# Altium PCB HTY-21024A V01.PcbDoc
Units mm, origin at the board's own origin, x right, y up, seen from the top; angles counter-clockwise.
Board outline 61 x 86.5 mm, 2 copper layers (Top Layer, Bottom Layer); 45 components, 35 nets, 149 pads, 0 vias.
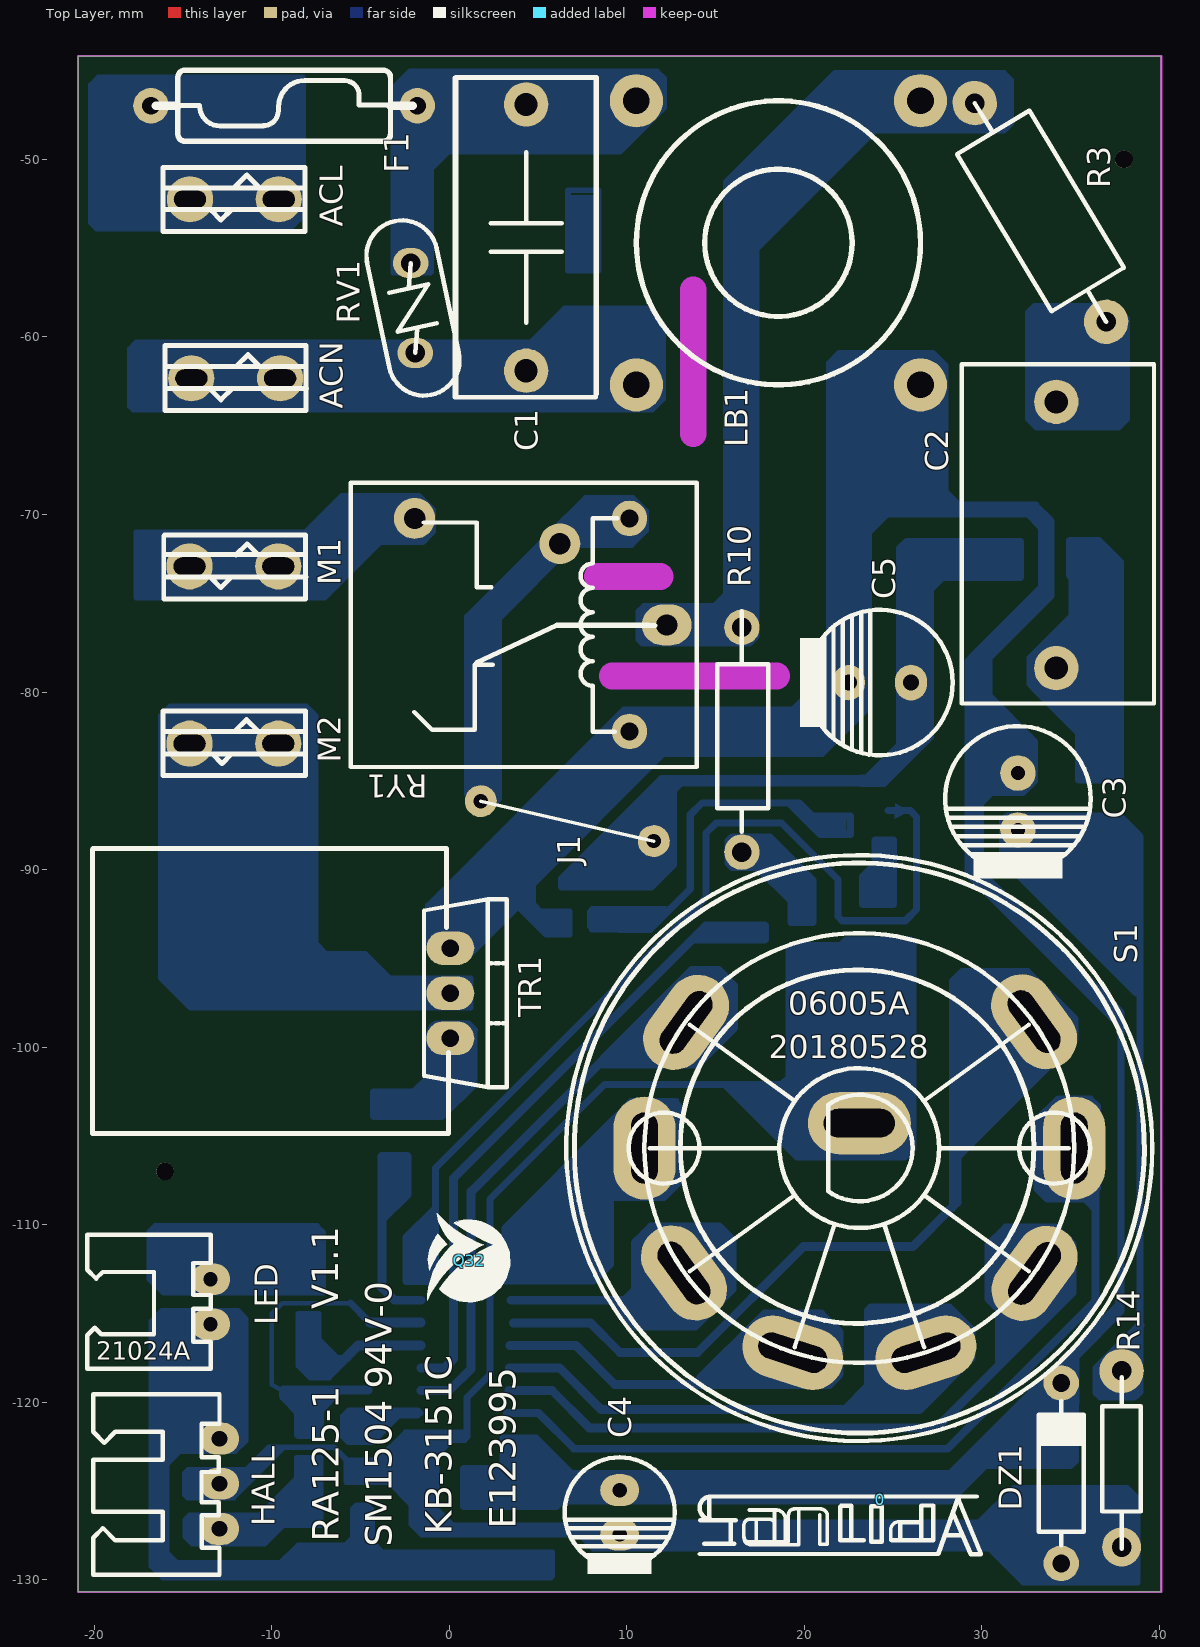
[diagram p0: Top Layer view]
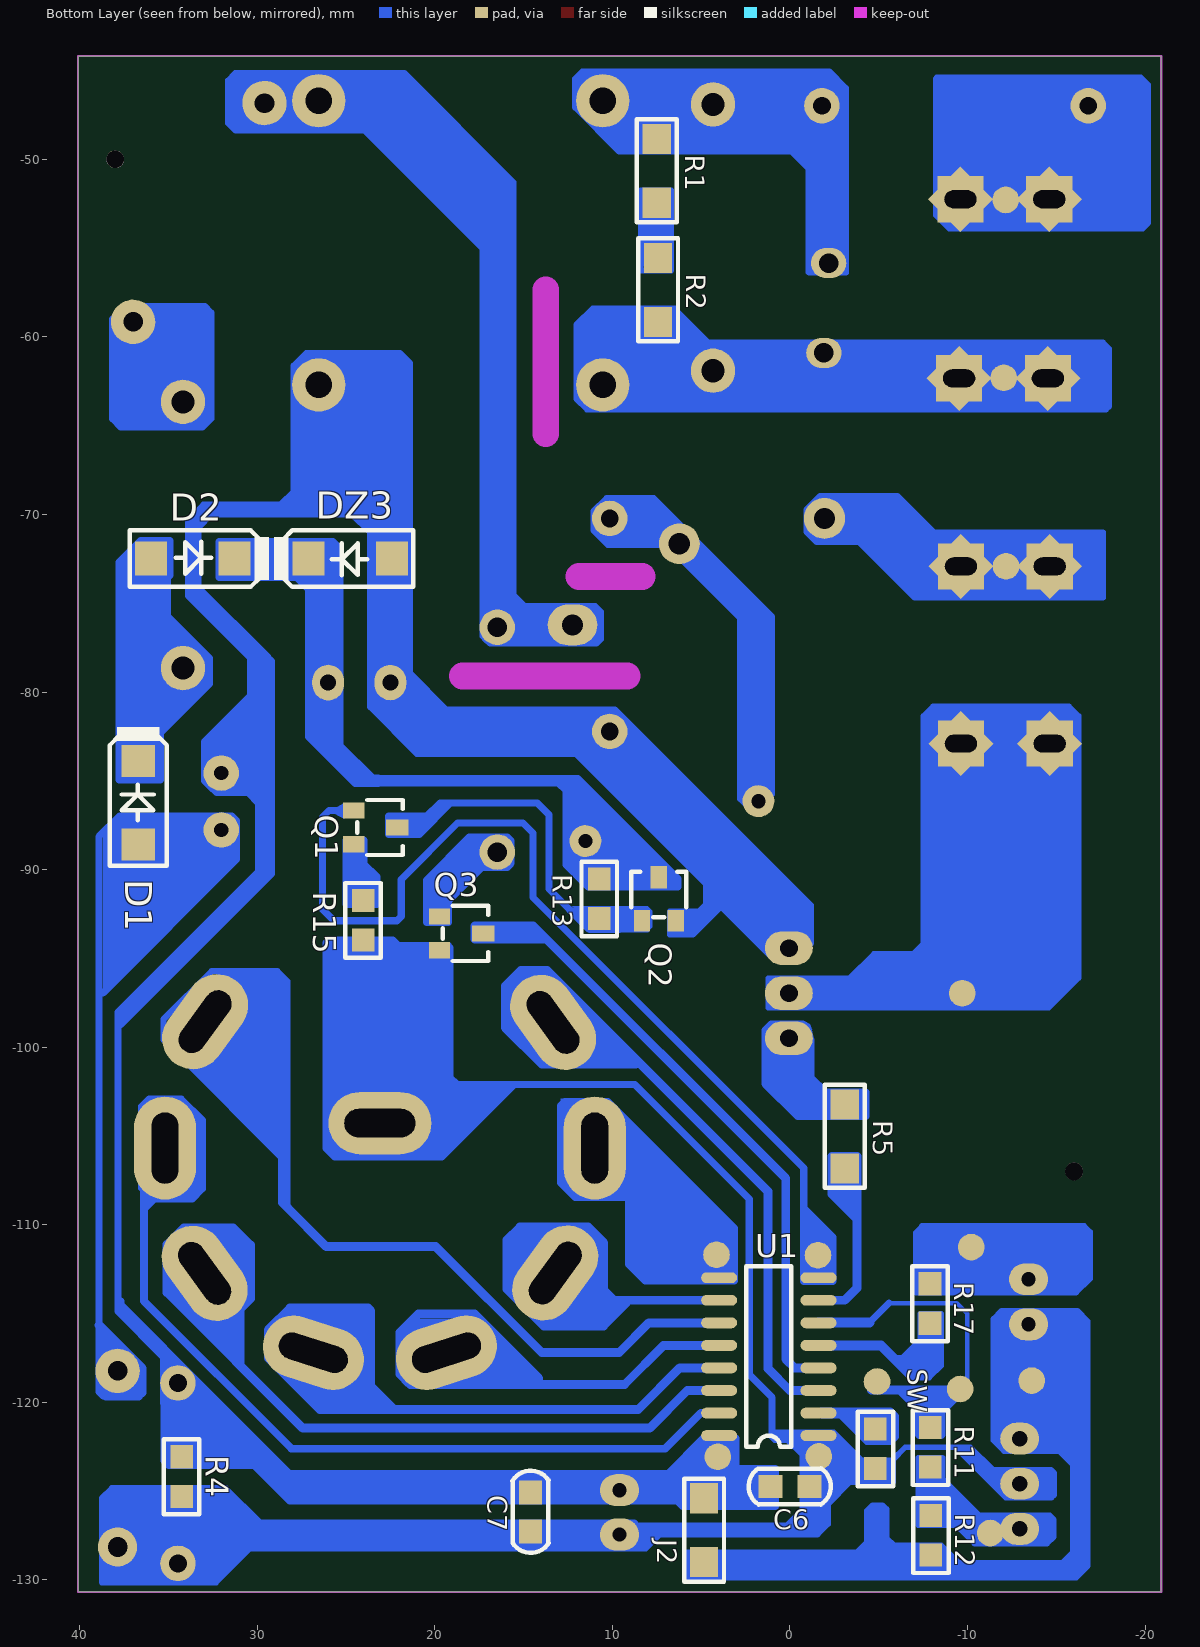
[diagram p1: Bottom Layer view, seen from below]

## Layer stack, top to bottom
Top Solder: solder mask 0.0102, Solder Resist, Dk 3.5
Top Layer: signal copper 0.0356
Dielectric 1: dielectric 0.32, FR-4, Dk 4.8
Bottom Layer: signal copper 0.0356
Bottom Solder: solder mask 0.0102, Solder Resist, Dk 3.5

## Board outline
-20.904,-130.683 -20.904,-44.183 40.096,-44.183 40.096,-130.683

## Design rules (kind name [scope] priority, off if disabled: settings)
Clearance [All] p1: gap=0.254
PolygonConnect [All] p1: connectstyle=Relief reliefconductorwidth=0.254 reliefentries=4 polygonreliefangle="90 Angle" airgapwidth=0.254
RoutingVias [All] p1: holewidth=0.711 width=1.27 viastyle="Through Hole" minholewidth=0.711 minwidth=1.27 maxholewidth=0.711 maxwidth=1.27
SolderMaskExpansion [All] p1: expansion=0.051
Width [All] p1: maxlimit=0.254 minlimit=0.254 preferedwidth=0.254
30 further rules are at their usual default settings.

## Components (designator, comment, footprint, x,y, rotation, side; value= is the part's Value field where it differs from the comment)
0 "" LOGO-SLD 22.011,-126.898 r0 top locked
ACL "" H250P -12.101,-52.248 r0 top
ACN "" H250P -12.025,-62.332 r0 top
C1 "" "C-X2-15 - 2" 4.335,-46.905 r270 top
C2 "" "C-X2-15 - 2" 34.188,-63.654 r270 top
C3 "" EC8#1 32.029,-86.018 r270 top
C4 "" EC6 9.601,-126.203 r270 top
C5 "" EC8#2 24.256,-79.467 r180 top
C6 "" 0805-C 0.007,-124.739 r180 bottom
C7 "" 0805-C 14.604,-126.178 r270 bottom
D1 "" SMA 36.702,-86.236 r90 bottom
D2 "" SMA 33.629,-72.482 r180 bottom
DZ1 "" DO-41 34.468,-129.074 r90 top
DZ3 "" SMA 24.778,-72.482 r0 bottom
F1 "" FU3.6X10 -9.297,-46.981 r0 top locked
HALL "" H-XH-3 -15.287,-124.589 r270 top
J1 "" 10mm 1.777,-86.147 r347 top
J2 "0R" 1206-R 4.841,-127.203 r270 bottom
LB1 "" L-D15*10 18.541,-54.702 r0 top
LED "" H-XH-2 -15.787,-114.341 r90 top
M1 "" H250P -12.127,-72.923 r0 top
M2 "" H250P -12.127,-82.906 r0 top
Q1 "" SOT-23 22.113,-87.63 r270 bottom
Q2 "" SOT-23 7.391,-90.433 r180 bottom
Q3 "" SOT-23 17.287,-93.599 r270 bottom
Q19 "" Logo 83.613,-105.323 r0 top
Q32 "" LOGO-HTY 1.118,-112.039 r90 top
R1 "0R" 1206-R 7.508,-50.648 r270 bottom
R2 "0R" 1206-R 7.431,-57.353 r270 bottom
R3 "" RR2W#1 33.367,-53.179 r121 top
R4 "" 0805-R 34.264,-124.197 r270 bottom
R5 "0R" 1206-R -3.084,-105.029 r270 bottom
R10 "" RR2W#2 16.484,-82.642 r90 top
R11 "" 0805-R -7.91,-122.555 r270 bottom
R12 "" 0805-R -7.936,-127.508 r270 bottom
R13 "" 0805-R 10.744,-91.659 r270 bottom
R14 "100R" RR2W#3 37.812,-123.612 r90 top
R15 "" 0805-R 24.043,-92.862 r270 bottom
R17 "" 0805-R -7.885,-114.452 r270 bottom
RV1 "" RV4-P5 -2.032,-58.419 r102 top
RY1 "" JK1C 12.252,-76.222 r180 top locked
S1 "" SW-MFR01 23.096,-105.683 r180 top locked
SW "" 0805-R -4.811,-122.631 r270 bottom
TR1 "" TO220VS 0.061,-94.424 r270 top
U1 "" SO-16 -1.6,-121.878 r0 bottom

## Footprints (in the part's own frame and the unit in brackets; to place one, negate y for a bottom-side part, rotate by r counter-clockwise, add the part's x,y. Pads: shape width x height; smd on the part's side, far side on the other; paste and mask are expansions set on the pad)
10mm [mm] "Jump Line"
  round 1.8 hole 0.8: 1(0,0) 2(10,0)
  silkscreen extent 0,0 10,0
0805-C [mm]
  rect 1.35x1.3 smd mask+0.05: 1(-1.1,0) 2(1.1,0)
  silkscreen extent -2.32,-1.03 2.31,1.03
0805-R [mm]
  rect 1.3x1.27 smd mask+0.05: 1(-1.125,0) 2(1.1,0)
  silkscreen extent -2.11,-1 2.11,1
1206-R [mm]
  rect 1.7x1.6 smd mask+0.05: 1(-1.8,0) 2(1.8,0)
  silkscreen extent -2.9,-1.12 2.9,1.12
"C-X2-15 - 2" [mm] "MAX  15*19*10.8mm"
  round 2.5 hole 1.3: 1(0,0) 2(15,0)
  silkscreen extent -1.5,-4.01 16.5,3.91
DO-41 [mm] "DIODE  Example :  1N4007"
  round 2 hole 1: 1(0,0) 2(10.16,0)
  silkscreen extent 1.02,-1.27 9.14,1.27
EC6 [mm]
  oval 1.8x2.2 hole 0.8 mask+0: 1(-1.25,0) 2(1.25,0)
  silkscreen extent -3.1,-3.1 3.48,3.1
EC8#1 [mm]
  round 2 hole 0.8 mask+0: 1(-1.45,0) 2(1.75,0)
  silkscreen extent -4.1,-4.1 4.5,4.1
EC8#2 [mm]
  oval 1.8x2.01 hole 0.9 mask+0: 1(-1.75,0)
  oval 1.8x2 hole 0.9 mask+0: 2(1.75,0)
  silkscreen extent -4.1,-4.1 4.5,4.1
FU3.6X10 [mm] "MAX T6.3A  FUSE     3.6*10mm"
  round 2 hole 1: 1(-7.5,0) 2(7.5,0)
  silkscreen extent -7.23,-2 7.23,2
H250P [mm] "250 #   6.3*0.8MM"
  round 2.6 / inner rect 2.6x2.6 / far side rect 2.6x2.6 hole 1 slot 1.8 at 0 deg: 1(-2.5,0) 1(-2.5,0) 1(2.5,0) 1(2.5,0)
H-XH-2 [mm] "XH 2.54mm"
  oval 1.8x2.2 hole 0.8 mask+0: 1(-1.27,-2.35) 2(1.27,-2.35)
  silkscreen extent -3.77,-2.35 3.77,4.6
H-XH-3 [mm]
  oval 1.8x2.2 hole 0.889 mask+0: 1(-2.54,2.35) 2(0,2.35) 3(2.54,2.35)
  silkscreen extent -5.04,-4.76 5.13,2.35
JK1C [mm]
  oval 2.8x2.3 hole 1.2: 1(0,0)
  oval 2.32x2.3 hole 1.2: 3(14.2,-6)
  round 2 hole 1: 4(2.1,-6) 5(2.1,6)
  silkscreen extent -1.7,-8 17.8,8
L-D15*10 [mm] "Common mode  Inductance"
  round 1 on Top Overlay: 0(-2.5,5) 1(2.505,5)
  round 3 hole 1.5: 1(-8,8) 2(-8,-8) 3(8,8) 4(8,-8)
  silkscreen extent -8,-8 8,8
Logo [mm]
  round 0.069 on Top Overlay: 1(-1.614,-1.16) 1(-1.614,-1.16) 1(-1.614,0.802) 1(-1.614,0.802)
  silkscreen extent -20.13,-15.36 91.93,40.98
LOGO-HTY [mm]
  silkscreen extent -2.3,-2.31 2.69,2.37
LOGO-SLD [mm]
  round 0.98 on Top Overlay: 0(2,2.036)
  round 0.58 on Top Overlay: 1(2.508,0.787)
  silkscreen extent -7.91,-1.65 7.93,1.59
RR2W#1 [mm]
  round 2.5 hole 1.1: 1(-6.987,-0.037) 2(7.384,-0.038)
  silkscreen extent -6.99,-2.46 7.38,2.29
RR2W#2 [mm]
  round 2 hole 1.1: 1(-6.375,0) 2(6.287,0)
  silkscreen extent -5.23,-1.47 7.19,1.4
RR2W#3 [mm]
  round 2.2 hole 1.1: 1(-4.54,-0.059)
  round 2.5 hole 1.1: 2(5.378,-0.059)
  silkscreen extent -4.65,-1.14 5.03,1.04
RV4-P5 [mm] "MOV-7X4-P5mm"
  oval 2x1.7 hole 1.1 rot 78: 1(-2.45,0.4) 2(2.55,-0.4)
  silkscreen extent -4.95,-2.01 5.05,2
SMA [mm] "DO-214AC"
  rect 1.8x1.9 smd mask+0: 1(-2.35,0) 2(2.35,0)
  silkscreen extent -3.55,-1.6 4.27,1.6
SO-16 [mil]
  oval 80x24 smd: 1(0,0) 2(0,-50) 3(0,-100) 4(0,-150) 5(0,-200) 6(0,-250) 7(0,-300) 8(0,-350) 9(220,-350) 10(220,-300) 11(220,-250) 12(220,-200) 13(220,-150) 14(220,-100) 15(220,-50) 16(220,0)
  silkscreen extent 60,-375 160,25
SOT-23 [mm]
  rect 0.914x1.27 smd: 1(0,0)
  rect 0.914x1.2 smd: 2(-0.95,-2.455) 3(0.95,-2.455)
  silkscreen extent -1.55,-2.26 1.55,0.3
SW-MFR01 [mm] "MFR01-A1F06L1S-R"
  round 0.48 on Top Overlay: 0(0,0)
  oval 5.8x3.5 hole 1.5 slot 4 at 126 deg rot 126: 1(-9.844,-7.116) 6(9.876,7.036)
  oval 3.5x5.8 hole 1.5 slot 4 at 90 deg: 2(-12.105,0) 7(12.1,0)
  oval 5.8x3.5 hole 1.5 slot 4 at 54 deg rot 54: 3(-9.869,7.057) 8(9.754,-7.077)
  oval 5.8x3.5 hole 1.5 slot 4 at 18 deg rot 18: 4(-3.748,11.527)
  oval 5.8x3.5 hole 1.5 slot 4 at 162 deg rot 162: 5(3.746,11.522)
  oval 5.8x3.5 hole 1.6 slot 4 at 0 deg: 11(0,-1.4)
  silkscreen extent -16.5,-16.5 16.5,16.5
TO220VS [mm]
  oval 1.9x2.7 hole 1: 1(5.08,0) 2(2.54,0) 3(0,0)
  silkscreen extent -2.75,-1.48 7.83,3.18

## Free pads (board coordinates)
  round 1 hole 1 mask+0.6: 0(-16,-107) 0(38,-50)
  round 1.5 smd far side mask+0: 0(-13.615,-118.781) 0(-12.167,-72.923) 0(-12.149,-52.286) 0(-12.04,-62.306) 0(-11.278,-127.366) 0(-10.211,-111.263) 0(-9.703,-96.963) 0(-9.58,-119.252) 0(-4.903,-118.832) 0(-1.626,-123.048) 0(-1.575,-111.72) 0(4.063,-123.074) 0(4.14,-111.695)
  round 2.3 hole 1.2: 21(6.231,-71.649)
  round 0.5 on Top Overlay mask+0: 48(1.777,-86.147) 49(11.547,-88.45)

## Nets (pads, with @x,y where several pads share a name; then routed paths per layer and width w, separated by ;. In a path a pad name is that pad's centre, name@x,y a point inside that pad or via, vN(x,y) a via of type N, cw(c..) or ccw(c..) an arc to the next point about the centre after c; other vN are vias at no path point)
NewNet1: Q3.2 R10.1 | length 22.1
  Bottom Layer w0.4: R10.1@15.714,-89.641 15.714,-88.371 15.905,-88.18 18.064,-88.18 20.477,-90.593 20.477,-92.985 19.249,-92.985 19.249,-91.779 17.344,-89.874 15.926,-89.874 15.756,-89.704 ; R10.1@16.455,-88.985 17.661,-88.985 19.947,-91.271 Q3.2@19.947,-92.647
NewNet2: C4.2 C6.2 C7.2 DZ1.1 HALL.2 pad.0@-1.626,-123.048 Q3.3 R4.2 R14.1 R15.2 S1.11 SW.2 U1.1 | length 219.6
  Bottom Layer w0.32: -5.844,-123.211 -5.802,-123.253 -5.802,-124.492 -3.389,-124.492 -2.14,-125.741 -2.14,-126.862 -1.547,-127.455 0.464,-127.455 ; -0.034,-126.936 0.199,-126.936 ; -9.303,-122.525 -12.143,-125.365 -14.733,-125.365 -14.885,-125.213 -14.885,-123.999 -14.69,-123.804 -11.422,-123.804 -10.143,-122.525 -9.303,-122.525 ; -9.303,-122.525 -6.498,-122.525 -5.759,-123.264 -4.024,-123.264 -2.468,-121.708 0.866,-121.708 0.866,-122.058 0.866,-122.121 0.157,-122.121 -0.701,-122.978 -0.701,-126.037 0.199,-126.936 ; 0.199,-126.936 8.588,-126.936 8.762,-126.762 29.844,-126.762 31.786,-124.82 38.193,-124.82 38.765,-125.391 38.765,-130.154 32.319,-130.154 30.404,-128.238 8.115,-128.238 7.332,-127.455 0.464,-127.455 ; 0.199,-126.936 0.464,-127.201 0.464,-127.455
  Bottom Layer w0.4: SW.2@-5.029,-123.857 -1.505,-123.857 ; -1.558,-126.682 C6.2@-1.558,-124.862 ; -1.554,-126.682 ccw(c-1.198,-126.682) -1.198,-127.038 ; C6.2@-1.505,-124.968 -1.505,-123.857 ; -1.431,-123.857 -1.505,-123.857 ; 0.591,-121.909 -1.505,-121.909 -1.505,-123.857 ; 0.76,-122.058 0.866,-122.058 1.003,-121.92 1.003,-119.734 2.294,-118.442 2.294,-108.553 8.74,-102.108 15.509,-102.108 ; 18.65,-102.108 15.509,-102.108 ; 18.783,-102.066 19.143,-101.706 19.143,-94.382 19.249,-94.276 22.043,-94.276 22.36,-93.959 26.001,-93.959 ; S1.11@22.657,-104.479 22.657,-94.573 ; 26.012,-93.991 26.128,-94.107 26.128,-105.706 25.641,-106.193 19.594,-106.193 15.509,-102.108
NewNet3: Q3.1 U1.4 | length 43.8
  Bottom Layer w0.5: U1.4 -0.252,-118.068 0.241,-117.575 0.241,-107.393 14.459,-93.176 17.746,-93.176 17.746,-93.927 13.731,-93.927 ; 14.112,-93.588 Q3.1@17.524,-93.588
NewNet4: Q1.1 Q2.2 R13.2 | length 29.5
  Bottom Layer w0.3: Q2.2@8.026,-93.404 9.579,-93.404 9.622,-93.361 9.85,-93.133 ; 9.598,-93.361 9.85,-93.133 ; 10.084,-92.922 9.85,-93.133
  Bottom Layer w0.4: 9.322,-92.266 12.052,-92.266 ; 9.576,-93.133 9.85,-93.133 ; 9.598,-93.361 9.622,-93.361 11.302,-93.361 13.576,-91.087 13.576,-86.91 14.232,-86.254 19.122,-86.254 ; 19.122,-86.254 20.879,-88.011 22.595,-88.011 22.595,-86.995 20.455,-86.995 19.715,-86.254 19.122,-86.254
NewNet5: C3.1 C4.1 C5.2 C6.1 C7.1 DZ1.2 DZ3.1 J2.1 pad.0@4.063,-123.074 Q2.3 R4.1 RY1.5 TR1.3 U1.16 | length 368
  Bottom Layer w0.32: 27.965,-61.611 27.24,-60.886 21.969,-60.886 21.386,-61.469 21.386,-78.942 19.365,-80.962 9.858,-80.962 9.375,-81.446 -1.194,-92.015 -1.194,-94.153 -0.436,-94.911 1.065,-94.911 3.881,-92.095 5.459,-93.673 6.777,-93.673 6.777,-92.361 5.136,-92.361 4.729,-91.953 4.729,-90.826 12.063,-83.492 21.016,-83.492 23.662,-80.846 23.662,-71.014 24.678,-69.998 32.171,-69.998 32.192,-69.977 32.732,-69.437 ; 27.97,-61.621 27.97,-68.707 28.689,-69.427 33.05,-69.427
  Bottom Layer w0.4: TR1.3@0.178,-93.98 0.178,-92.329 10.126,-82.381 20.413,-82.381 22.36,-80.433 22.36,-66.76 26.34,-62.78 ; 30.277,-123.275 30.277,-123.476 ; 31.949,-69.977 32.192,-69.977 32.605,-69.977 33.346,-70.718 33.346,-74.105 29.409,-78.041 29.42,-78.052 ; 32.51,-85.46 C3.1@32.573,-85.397 ; 32.986,-69.469 33.875,-70.358 33.875,-74.591 30.383,-78.084 ; 35.262,-119.951 35.262,-120.057 ; 37.685,-114.3 37.685,-114.512 32.753,-119.444 32.764,-119.444 ; 37.685,-98.721 29.209,-90.246 29.209,-78.262 29.42,-78.052 ; 29.42,-78.052 29.917,-78.549 30.383,-78.084 ; 29.42,-78.052 29.578,-77.893 30.383,-77.893 30.383,-78.084 ; 30.277,-123.476 28.192,-125.561 6.358,-125.561 6.041,-125.878 0.813,-125.878 0.813,-123.74 3.035,-123.74 3.035,-122.015 4.887,-122.015 6.877,-124.005 28.202,-124.005 32.764,-119.444 ; 30.277,-123.476 30.563,-123.19 30.85,-123.19 31.009,-123.031 32.732,-123.031 32.732,-121.221 33.896,-120.057 35.262,-120.057 ; 30.277,-123.476 30.277,-123.571 34.991,-123.571 35.262,-123.301 35.262,-120.057 ; 30.383,-78.084 30.383,-80.2 32.965,-82.783 32.965,-85.005 32.902,-85.068 32.752,-85.218 32.716,-85.255 32.308,-85.662 30.533,-85.662 29.921,-86.274 29.921,-90.11 37.842,-98.032 37.842,-114.884 35.293,-117.433 DZ1.2@35.293,-119.168 ; 32.764,-119.444 DZ1.2@35.293,-119.444 ; 32.764,-119.444 33.039,-119.168 DZ1.2@35.293,-119.168 ; 35.262,-120.057 35.293,-120.057 DZ1.2@35.293,-119.444 ; DZ1.2@35.293,-119.444 DZ1.2@35.293,-119.168
NewNet6: C5.1 D2.2 DZ3.2 J1.2 Q2.1 R13.1 | length 103.1
  Bottom Layer w0.4: 6.323,-90.974 11.375,-90.974 12.624,-89.725 12.624,-85.534 13.047,-85.111 23.165,-85.111 ; 6.324,-90.973 6.324,-90.501 11.946,-84.878 23.165,-84.878 ; 10.634,-88.815 10.634,-87.164 12.158,-85.64 ; 23.927,-85.111 23.165,-85.111 ; 25.938,-82.444 25.938,-72.834 26.192,-72.581 31.279,-72.581 D2.2@31.399,-72.581 ; 23.165,-85.111 23.165,-85.153 24.488,-85.153 27.101,-82.541 27.101,-74.235 27.782,-73.554 32.161,-73.554 32.161,-71.522 25.75,-71.522 25.349,-71.923 25.349,-83.012 23.503,-84.857 23.165,-84.857 23.165,-84.878 ; 23.165,-85.111 23.165,-84.878
NewNet7: pad.0@-1.575,-111.72 Q1.2 U1.8 | length 63.5
  Bottom Layer w0.4: U1.8@-1.526,-112.882 -1.526,-110.045 ; -0.891,-109.167 -2.424,-110.7 -2.424,-111.949 -2.424,-113.199 -0.773,-113.199 -0.773,-111.72 -0.773,-106.807 14.465,-91.569 14.465,-87.947 15.037,-87.376 18.72,-87.376 21.895,-90.551 21.895,-92.645 22.13,-92.879 25.684,-92.879 26.319,-92.244 26.319,-87.035 25.963,-86.68 Q1.2@24.712,-86.68
NewNet8: Q1.3 R15.1 | length 10.3
  Bottom Layer w0.4: R15.1@24.414,-91.969 23.271,-91.969 23.271,-90.403 23.99,-89.683 23.99,-88.328 25.006,-88.328 25.006,-91.969 R15.1@24.435,-91.969
NewNet9: ACN.1 C1.2 pad.0@-12.04,-62.306 R2.2 RV1.1 | length 99.7
  Bottom Layer w0.32: 6.496,-58.399 4.58,-60.314 -17.623,-60.314 -17.983,-60.674 -17.983,-63.902 -17.793,-64.093 11.438,-64.093 12.039,-63.492 12.039,-59.317 11.1,-58.378 6.528,-58.378
  Bottom Layer w0.4: ACN.1@-16.078,-62.357 -2.828,-62.357 -1.812,-61.341 0.855,-61.341 1.448,-61.934 7.501,-61.934 ; 7.501,-61.976 7.501,-61.934 ; R2.2@7.501,-59.013 7.501,-61.934 ; 10.338,-61.68 10.592,-61.934 7.501,-61.934
NewNet10: R1.2 R2.1 | length 12.5
  Bottom Layer w0.32: R2.1@6.693,-56.261 8.407,-56.261 8.407,-51.74 6.693,-51.74 R2.1@6.693,-56.261
NewNet11: C1.1 F1.2 R1.1 RV1.2 | length 50.3
  Bottom Layer w0.32: 11.692,-45.043 -2.214,-45.043 -3.15,-45.978 -3.15,-56.379 -1.067,-56.379 -1.067,-50.563 -0.076,-49.572 9.618,-49.572 12.115,-47.075 12.115,-45.457 11.709,-45.05
NewNet12: R5.2 U1.7 | length 15.4
  Bottom Layer w0.5: -3.759,-109.664 -2.373,-108.278 -2.373,-106.151 -3.78,-106.151 -3.78,-113.561 -3.084,-114.258 U1.7
NewNet13: R5.1 TR1.1 | length 24.5
  Bottom Layer w0.4: R5.1@-3.611,-102.933 -1.05,-102.933 0.262,-101.621 TR1.1@0.262,-99.483 ; TR1.1@-1.177,-99.589 -1.177,-101.706 -2.011,-102.54 -4.267,-102.54 -4.267,-103.911 -0.419,-103.911 1.405,-102.087 1.405,-99.028 ; TR1.1@-1.169,-99.584 -1.076,-99.217 -0.981,-98.842 TR1.1@-0.743,-98.7 ; 1.077,-98.7 1.405,-99.028 ; 1.416,-99.039 1.405,-99.028
NewNet14: R17.2 U1.5 | length 19.7
  Bottom Layer w0.3: R17.2@-7.717,-115.485 -7.717,-117.517 -5.664,-117.517 -6.765,-118.618 -7.844,-118.618 -8.522,-117.941 -8.522,-115.02 -7.336,-115.02 -7.336,-116.459 -6.32,-117.475 -5.806,-117.475
  Bottom Layer w0.55: -5.806,-117.475 -5.129,-116.798 U1.5
NewNet15: LED.2 pad.0@-10.211,-111.263 R17.1 | length 26.2
  Bottom Layer w0.32: -7.442,-110.098 -7.093,-110.448 -7.093,-113.824 -16.11,-113.824 -16.893,-113.041 -16.893,-110.405 -16.565,-110.077 -7.432,-110.077
NewNet16: SW.1 U1.2 | length 10.7
  Bottom Layer w0.32: U1.2@-1.789,-120.752 -2.824,-120.752 -4.331,-122.259 -5.667,-122.259 -5.982,-121.944 -5.982,-120.779 -5.65,-120.447 -1.761,-120.447 U1.2
NewNet17: HALL.1 J2.2 LED.1 pad.0@-13.615,-118.781 R12.2 | length 127.4
  Bottom Layer w0.32: HALL.1@-12.924,-121.835 HALL.1@-12.924,-121.475 ; LED.1@-12.924,-115.401 HALL.1@-12.924,-121.475 ; HALL.1@-12.607,-121.475 HALL.1@-12.924,-121.475 ; -5.472,-128.067 -8.52,-128.067 -9.485,-129.032 -15.358,-129.032 -15.926,-128.464 -15.926,-123.504 -15.168,-122.745 -12.057,-122.745 -11.456,-122.145 -11.456,-115.307 -11.913,-114.849 -16.18,-114.849 -16.777,-115.446 -16.777,-129.222 -16.121,-129.879 -3.103,-129.879 ; -5.431,-128.027 -5.431,-126.016 -5.209,-125.793 ; -5.114,-125.793 -4.648,-125.793 -4.331,-126.111 -4.331,-127.889 -3.78,-128.439 -2.828,-128.439 ; -3.103,-129.847 -3.103,-129.879 ; J2.2@5.575,-129.106 -3.04,-129.106 ; HALL.1@-12.924,-121.475 -15.105,-121.475 -16.184,-122.555 -16.184,-128.609 -15.38,-129.413 -8.744,-129.413 -8.437,-129.106 -3.04,-129.106 ; -3.103,-129.879 -3.04,-129.879 ; -3.04,-129.879 -3.04,-129.106 ; -3.04,-129.879 5.713,-129.879 5.808,-129.783 5.808,-128.439 -2.828,-128.439 ; -3.04,-129.106 -3.04,-128.651 -2.828,-128.439
NewNet18: HALL.3 pad.0@-11.278,-127.366 R11.2 R12.1 | length 22.7
  Bottom Layer w0.32: -14.86,-127.575 -14.479,-127.956 -10.388,-127.956 -9.347,-126.915 -7.231,-126.915 -7.231,-123.655 -7.231,-123.126 -8.585,-123.126 -8.585,-124.291 -10.676,-126.381 -14.631,-126.381 -14.86,-126.61 -14.86,-127.575
NewNet19: pad.0@-4.903,-118.832 pad.0@-9.58,-119.252 R11.1 U1.6 | length 25.2
  Bottom Layer w0.254: pad.0@-9.58,-119.252 -9.986,-119.007 -9.986,-115 -9.402,-114.416 -5.567,-114.416
  Bottom Layer w0.4: -5.567,-114.416 -4.474,-115.508
  Bottom Layer w0.5: pad.0@-9.347,-119.613 -9.347,-119.316 pad.0@-4.585,-119.316 ; pad.0@-9.305,-119.719 -9.279,-119.745 -8.501,-120.523 -8.501,-121.814 -7.294,-121.814 -7.294,-120.417 -6.215,-119.338
  Bottom Layer w0.55: -4.474,-115.508 U1.6@-1.6,-115.508
NewNet20: S1.8 U1.3 | length 45.7
  Bottom Layer w0.4: 8.666,-100.626 13.661,-95.631 15.185,-95.631 16.074,-96.52 16.074,-98.933 14,-101.007 8.687,-101.007
  Bottom Layer w0.5: U1.3 0.002,-119.338 1.236,-118.104 1.236,-108.14 8.666,-100.711 8.898,-100.711 9.682,-99.928
NewNet21: pad.0@4.14,-111.695 S1.7 U1.9 | length 34.4
  Bottom Layer w0.4: U1.9@3.139,-113.157 8.158,-113.157 9.089,-112.226 9.089,-108.458 12.105,-108.458 12.918,-107.645 12.918,-103.302 12.689,-103.073 10.251,-103.073 9.468,-103.856 9.318,-104.006 3.139,-110.185 U1.9@3.139,-113.157
NewNet22: S1.6 U1.10 | length 26.9
  Bottom Layer w0.5: U1.10@3.48,-114.258 U1.10 9.914,-114.258 10.486,-113.686 10.486,-111.019 11.003,-110.502 11.371,-110.134 15.204,-110.134 15.94,-110.871 15.94,-113.614 13.858,-115.697 10.507,-115.697 9.237,-114.427
NewNet23: S1.1 U1.11 | length 64.5
  Bottom Layer w0.35: 28.308,-109.029 28.308,-96.287 28.88,-95.716 30.256,-95.716 32.578,-95.716 35.277,-98.414 35.277,-99.585 34.617,-100.244 34.378,-100.483 28.59,-106.272 28.329,-106.532
  Bottom Layer w0.5: U1.11@3.607,-115.528 U1.11 7.946,-115.528 9.618,-117.2 13.98,-117.2 19.949,-111.231 26.107,-111.231 28.308,-109.029 28.59,-108.748 28.59,-106.272 28.59,-105.497
NewNet24: S1.5 U1.12 | length 32.1
  Bottom Layer w0.5: U1.12@3.416,-116.798 U1.12 7.12,-116.798 9.322,-118.999 21.387,-118.999 21.465,-118.921 21.96,-118.426 21.96,-116.059 20.938,-115.037 17.769,-115.037 17.675,-115.131 17.475,-115.331 14.148,-118.658 14.148,-118.978
NewNet25: S1.4 U1.13 | length 42.2
  Bottom Layer w0.5: U1.13@3.395,-118.068 U1.13 6.21,-118.068 8.56,-120.417 26.467,-120.417 29.377,-117.507 29.377,-115.926 28.753,-115.302 28.55,-115.098 28.154,-114.702 23.757,-114.702 23.609,-114.85 23.609,-119.105 22.318,-120.396
NewNet26: S1.3 U1.14 | length 50.9
  Bottom Layer w0.5: U1.14@3.353,-119.338 U1.14 5.787,-119.338 7.904,-121.454 27.44,-121.454 35.082,-113.813 35.082,-111.125 34.142,-110.185 31.358,-110.185 30.393,-111.15 30.393,-114.173 30.741,-114.521 30.963,-114.743 30.975,-114.755 30.975,-117.856
NewNet27: S1.2 U1.15 | length 60.2
  Bottom Layer w0.35: 36.362,-108.966 35.981,-108.585 33.67,-108.585 33.071,-107.986 33.071,-104.104 34.279,-102.895 36.108,-102.895 36.54,-103.327 36.54,-107.952 S1.2@36.394,-108.098
  Bottom Layer w0.45: U1.15@3.247,-120.608 U1.15 5.025,-120.608 7.036,-122.618 28.065,-122.618 36.394,-114.289 S1.2@36.394,-108.098
NewNet28: C2.2 D1.2 D2.1 | length 33.6
  Bottom Layer w0.4: 34.933,-73.448 34.933,-71.48 36.584,-71.48 37.791,-72.686 37.791,-84.952 35.452,-84.952 35.452,-82.296 32.97,-79.814 32.85,-79.694 32.7,-79.544 32.7,-78.094 35.071,-75.724 35.071,-73.512 34.997,-73.512
NewNet29: C3.2 D1.1 R14.2 | length 59.7
  Bottom Layer w0.4: 38.68,-96.943 31.165,-89.428 31.165,-87.25 31.43,-86.984 37.77,-86.984 38.912,-88.127 38.912,-115.662 38.912,-119.421 38.684,-119.65
  Bottom Layer w0.5: 38.532,-119.645 36.69,-119.645 36.489,-119.444 36.489,-118.085 38.912,-115.662
NewNet30: R3.2 R10.2 RY1.1 | length 97.4
  Bottom Layer w0.32: 31.24,-45.138 31.653,-45.551 31.653,-47.964 31.229,-48.387 23.968,-48.387 17.322,-55.032 17.322,-76.868 17.159,-77.031 16.899,-77.29 10.903,-77.29 10.642,-77.029 10.642,-75.479 10.972,-75.149 14.923,-75.149 15.566,-74.507 15.566,-51.287 21.725,-45.127 31.25,-45.127
NewNet31: C2.1 R3.1 | length 27.7
  Bottom Layer w0.32: R3.1@37.41,-58.24 32.965,-58.24 32.584,-58.621 32.584,-64.611 33.092,-65.119 37.696,-65.119 38.193,-64.622 38.193,-58.991 R3.1@37.452,-58.251
  Bottom Layer w0.4: C2.1@33.96,-63.966 36.796,-61.129
NewNet32: ACL.1 F1.1 pad.0@-12.149,-52.286 | length 40
  Bottom Layer w0.32: -8.331,-45.466 -8.225,-45.466 -8.225,-53.149 -8.462,-53.387 -8.966,-53.89 -19.867,-53.89 -20.185,-53.573 -20.185,-45.805 -19.761,-45.381 -8.268,-45.381
NewNet33: M2.1 pad.0@-9.703,-96.963 TR1.2 | length 94
  Bottom Layer w0.32: -8.12,-80.814 -15.718,-80.814 -16.248,-81.343 -16.248,-96.107 -14.565,-97.79 1.219,-97.79 1.219,-96.114 -3.364,-96.114 -4.725,-94.753 -6.934,-94.753 -7.516,-94.17 -7.516,-81.354 -8.056,-80.814 -8.098,-80.814
  Bottom Layer w0.4: M2.1@-13.75,-83.566 M2.1@-9.601,-83.566 ; -12.184,-83.608 -12.184,-93.811 -10.025,-95.97 -9.686,-96.308 TR1.2@0.347,-96.308
NewNet34: M1.1 pad.0@-12.167,-72.923 RY1.3 | length 41.1
  Bottom Layer w0.32: -6.056,-68.94 -6.045,-68.94 ; -6.045,-68.94 -1.706,-68.94 -0.912,-69.734 -0.912,-70.982 -1.05,-71.12 -1.494,-71.564 -3.897,-71.564 -7.029,-74.697 -17.623,-74.697 -17.623,-70.993 -8.098,-70.993 -6.045,-68.94
NewNet35: J1.1 pad.21 RY1.4 | length 47.1
  Bottom Layer w0.32: J1.1@0.993,-85.766 1.415,-85.766 2.244,-86.595 2.819,-86.02 2.819,-75.845 6.941,-71.723 10.264,-71.723 11.079,-70.908 11.079,-69.818 10.338,-69.077 7.666,-69.077 5.663,-71.081 5.385,-71.358 0.993,-75.751 J1.1@0.993,-85.766
pads on no net: 0.0 0.1 LB1.0 LB1.1 LB1.2 LB1.3 LB1.4 Q19.1 S1.0

## Keep-outs
Keep-Out Layer:
  circle w0.127: c-2,18 r1.5
  circle w0.127: c-2,241.5 r1.5
  circle w0.127: c123.979,241.5 r1.5
  circle w0.127: c123.979,18 r1.5
  lines w0.127: 0,0 0,86.5 ; 0,0 61,0 61,86.5 ; 0,0 -2.7,0 -5,2.3 -5,257.1 -2.6,259.5 0,259.5 ; 0,86.5 61,86.5 ; 0,86.5 61,86.5 ; 0,86.5 0,173 ; 0,173 0,259.5 ; 0,173 61,173 ; 0,173 61,173 ; 0,173 61,173 ; 0,259.5 61,259.5 61,173 ; 60.979,86.5 60.979,0 121.979,0 ; 60.979,86.5 121.979,86.5 ; 60.979,86.5 60.979,173 ; 60.979,86.5 121.979,86.5 ; 60.979,173 121.979,173 ; 60.979,173 60.979,259.5 121.979,259.5 ; 60.979,173 121.979,173 ; 60.979,173 121.979,173 ; 61,86.5 61,173 ; 121.979,0 121.979,86.5 ; 121.979,0 124.7,0 127,2.3 127,257.2 124.7,259.5 121.979,259.5 ; 121.979,86.5 121.979,173 ; 121.979,173 121.979,259.5 ; -20.904,-130.683 40.096,-130.683 40.096,-44.183 -20.904,-44.183 -20.904,-130.683
  lines w1.5: 8.327,-73.491 11.883,-73.491 ; 9.174,-79.1 18.445,-79.1 ; 13.746,-65.447 13.746,-57.34 ; 29.231,57.192 32.787,57.192 ; 29.231,143.692 32.787,143.692 ; 29.231,230.192 32.787,230.192 ; 30.078,51.583 39.349,51.583 ; 30.078,138.083 39.349,138.083 ; 30.078,224.583 39.349,224.583 ; 34.65,65.236 34.65,73.343 ; 34.65,151.736 34.65,159.842 ; 34.65,238.236 34.65,246.342 ; 90.21,57.192 93.766,57.192 ; 90.21,143.692 93.766,143.692 ; 90.21,230.192 93.766,230.192 ; 91.056,51.583 100.327,51.583 ; 91.056,138.083 100.327,138.083 ; 91.056,224.583 100.327,224.583 ; 95.628,65.236 95.628,73.343 ; 95.628,151.736 95.628,159.842 ; 95.628,238.236 95.628,246.342

## Other copper
Bottom Layer:
  region: 99.869,-101.782 99.869,-99.852 96.237,-99.852 96.237,-101.782
  region: 99.869,-97.982 99.869,-96.052 96.237,-96.052 96.237,-97.982
  region: 106.676,-106.364 106.676,-104.358 103.272,-104.358 103.272,-106.364
  region: 94.814,-90.235 94.814,-88.305 91.258,-88.305 91.258,-90.235
  region: 86.381,-84.978 86.381,-82.895 82.876,-82.895 82.876,-84.978
  region: 99.158,-80.634 99.158,-78.551 95.119,-78.551 95.119,-80.634
  region: 86.381,-76.773 86.381,-74.894 83.283,-74.894 83.283,-76.773
  region net NewNet30: 21.725,-45.127 31.293,-45.127 31.653,-45.487 31.653,-47.964 31.229,-48.387 23.891,-48.387 17.271,-55.007 17.271,-76.918 16.899,-77.29 10.693,-77.29 10.693,-75.279 14.793,-75.279 15.566,-74.507 15.566,-51.287
  region net NewNet11: -2.659,-56.409 -2.998,-56.07 -2.998,-45.826 -2.214,-45.043 11.692,-45.043 12.073,-45.424 12.073,-47.244 9.787,-49.53 -0.034,-49.53 -0.881,-50.377 -0.881,-56.409
  region net NewNet10: 8.407,-52.028 6.735,-52.028 6.693,-51.985 6.693,-55.986 6.841,-56.134 8.111,-56.134 8.492,-55.753 8.492,-52.07 8.407,-51.985
  region net NewNet32: -20.185,-45.805 -20.185,-53.573 -19.867,-53.89 -8.966,-53.89 -8.225,-53.149 -8.225,-45.593 -8.289,-45.593 -8.501,-45.381 -19.761,-45.381
  region net NewNet9: -17.623,-60.314 -17.983,-60.674 -17.983,-63.902 -17.793,-64.093 11.438,-64.093 12.014,-63.518 12.014,-59.291 11.1,-58.378 11.079,-58.399 6.496,-58.399 4.58,-60.314
  region net NewNet34: -17.623,-70.993 -8.098,-70.993 -6.056,-68.95 -6.056,-68.94 -1.706,-68.94 -0.912,-69.734 -0.912,-70.982 -1.494,-71.564 -3.897,-71.564 -7.008,-74.676 -17.496,-74.676 -17.623,-74.549
  region net NewNet35: 2.793,-85.919 2.488,-86.224 1.574,-86.224 0.993,-85.642 0.993,-75.776 7.692,-69.077 10.338,-69.077 11.079,-69.818 11.079,-70.908 10.264,-71.723 6.941,-71.723 2.793,-75.871
  region net NewNet33: -16.248,-81.343 -15.718,-80.814 -8.056,-80.814 -7.516,-81.354 -7.516,-94.17 -6.934,-94.753 -4.598,-94.753 -3.243,-96.107 1.141,-96.107 1.141,-97.79 -14.565,-97.79 -16.248,-96.107
  region net NewNet5: 1.014,-94.911 -0.436,-94.911 -1.039,-94.308 -1.039,-91.834 9.833,-80.962 19.365,-80.962 21.239,-79.089 21.239,-61.616 21.969,-60.886 27.234,-60.886 27.97,-61.621 27.97,-68.707 28.732,-69.469 32.986,-69.469 33.875,-70.358 33.515,-70.718 33.346,-70.718 32.605,-69.977 24.699,-69.977 23.662,-71.014 23.662,-80.846 21.016,-83.492 12.063,-83.492 4.729,-90.826 4.729,-91.953 5.136,-92.361 6.777,-92.361 6.777,-93.673 5.459,-93.673 3.856,-92.07
  region net NewNet6: 23.482,-84.878 11.969,-84.878 6.27,-90.64 6.324,-90.911 11.438,-90.911 12.624,-89.725 12.624,-85.534 13.047,-85.111 24.541,-85.111 24.604,-85.175 27.025,-82.754 27.025,-74.235 27.706,-73.554 32.161,-73.554 32.161,-71.522 25.713,-71.522 25.399,-71.835 25.399,-82.961
  region net NewNet28: 34.933,-71.48 36.584,-71.48 37.791,-72.686 37.791,-84.952 35.452,-84.952 35.452,-82.127 32.7,-79.375 32.7,-78.094 34.933,-75.861
  region net NewNet5: 33.875,-70.358 33.875,-74.591 30.361,-78.105 30.383,-78.126 30.383,-80.2 32.965,-82.783 32.965,-85.005 32.499,-85.471 30.622,-85.471 29.853,-86.24 29.853,-90.043 29.853,-90.128 29.472,-90.509 29.184,-90.22 29.184,-78.266 33.346,-74.105 33.346,-70.168 33.409,-70.104
  region net NewNet5: 29.853,-90.043 37.727,-97.917 37.727,-98.679 37.685,-98.721 29.472,-90.509 29.472,-90.17 29.218,-89.916
  region net NewNet29: 31.038,-89.301 31.038,-87.377 31.43,-86.984 37.77,-86.984 38.691,-87.905 38.691,-96.933 38.68,-96.943
  region net NewNet29: 38.912,-115.713 38.912,-119.264 38.532,-119.645 38.521,-119.634 36.68,-119.634 36.489,-119.444 36.489,-118.136
  region net NewNet5: 35.314,-116.882 35.262,-116.935 35.262,-123.021 34.787,-123.495 28.713,-123.495
  region net NewNet5: 30.721,-123.031 28.192,-125.561 6.358,-125.561 6.041,-125.878 1.056,-125.878 0.813,-125.635 0.813,-123.825 0.897,-123.74 3.035,-123.74 3.035,-122.015 4.887,-122.015 6.877,-124.005 28.202,-124.005 29.906,-122.301 31.885,-122.301
  region net NewNet2: -2.14,-126.862 29.819,-126.862 31.862,-124.82 38.193,-124.82 38.765,-125.391 38.765,-129.9 38.489,-130.175 38.468,-130.154 32.319,-130.154 30.404,-128.238 8.115,-128.238 7.332,-127.455 -1.547,-127.455
  region net NewNet17: -8.361,-128.067 -6.056,-128.067 -5.431,-127.442 -5.431,-126.016 -5.209,-125.793 -4.648,-125.793 -4.331,-126.111 -4.331,-127.889 -4.225,-127.889 -3.675,-128.439 5.808,-128.439 5.808,-129.783 5.713,-129.879 -16.121,-129.879 -16.777,-129.222 -16.777,-129.074 -16.034,-128.331 -15.333,-129.032 -9.326,-129.032
  region net NewNet17: -16.777,-129.148 -16.777,-115.496 -16.13,-114.849 -11.939,-114.85 -11.456,-115.332 -11.456,-122.145 -12.057,-122.745 -15.168,-122.745 -15.926,-123.504 -15.926,-129.219 -16.078,-129.371 -16.629,-129.371 -16.713,-129.286
  region net NewNet18: -8.585,-123.126 -8.437,-122.978 -7.273,-122.978 -7.231,-123.021 -7.231,-126.915 -9.347,-126.915 -10.439,-128.007 -14.53,-128.007 -14.86,-127.677 -14.86,-126.788 -14.31,-126.238 -10.533,-126.238 -8.585,-124.291 -8.585,-123.126 -8.437,-122.978
  region net NewNet2: -9.62,-122.561 -10.076,-122.561 -11.303,-123.789 -14.563,-123.789 -14.834,-124.06 -14.834,-125.264 -14.783,-125.314 -12.043,-125.314 -9.216,-122.488
  region net NewNet19: -6.596,-119.38 -9.284,-119.38 -9.305,-119.359 -9.305,-119.719 -8.501,-120.523 -8.501,-121.814 -7.294,-121.814 -7.294,-120.396 -6.215,-119.316
  region net NewNet16: -5.65,-120.472 -2.544,-120.472 -4.331,-122.259 -5.812,-122.259 -5.982,-122.089 -5.982,-120.804
  region net NewNet2: -5.707,-123.264 -4.024,-123.264 -2.468,-121.708 0.389,-121.708 0.591,-121.909 0.379,-122.121 0.157,-122.121 -0.701,-122.978 -0.701,-126.037 0.464,-127.201 0.464,-127.455 -1.389,-127.455 -1.971,-126.873 -2.129,-126.873 -2.129,-125.751 -3.389,-124.492 -5.802,-124.492
  region net NewNet14: -5.664,-117.517 -5.707,-117.475 -6.32,-117.475 -7.485,-116.311 -7.485,-115.02 -8.522,-115.02 -8.522,-117.941 -7.844,-118.618 -6.765,-118.618
  region net NewNet24: 14.148,-118.978 17.81,-115.316 21.217,-115.316 21.789,-115.887 21.789,-118.491 21.387,-118.893 21.387,-118.999 14.169,-118.999
  region net NewNet25: 22.318,-120.396 22.339,-120.417 26.467,-120.417 29.377,-117.507 29.377,-116.173 27.906,-114.702 27.758,-114.85 23.609,-114.85 23.609,-119.105 22.614,-120.1 22.614,-120.269
  region net NewNet26: 30.975,-117.856 30.975,-113.39 30.488,-112.903 30.488,-111.358 31.61,-110.236 34.193,-110.236 35.082,-111.125 35.082,-113.813
  region net NewNet22: 9.237,-114.427 9.745,-114.427 10.634,-113.538 10.634,-110.871 11.206,-110.299 15.318,-110.3 15.864,-110.846 15.864,-113.589 13.756,-115.697 10.507,-115.697
  region net NewNet21: 3.268,-113.093 3.268,-110.107 10.462,-102.912 12.918,-102.912 12.918,-107.518 12.105,-108.331 9.152,-108.331 9.152,-112.162 8.158,-113.157 3.437,-113.157
  region net NewNet7: -0.891,-109.167 -0.891,-112.787 -1.135,-113.03 -2.225,-113.03 -2.225,-110.501
  region net NewNet12: -3.759,-109.664 -2.595,-108.5 -2.595,-106.151 -2.743,-106.299 -3.78,-106.299 -3.78,-109.643
  region net NewNet15: -7.093,-113.824 -7.093,-110.448 -7.463,-110.077 -16.565,-110.077 -16.893,-110.405 -16.893,-113.041 -16.777,-113.041 -15.994,-113.824
  region net NewNet27: 33.071,-108.088 33.695,-108.712 35.695,-108.712 36.394,-109.41 36.394,-108.098 36.616,-107.876 36.616,-103.53 35.879,-102.794 34.163,-102.794 33.071,-103.886
  region net NewNet23: 28.329,-106.532 28.329,-96.266 28.88,-95.716 30.256,-95.716 32.055,-95.716 35.103,-98.764 35.103,-99.758
  region net NewNet2: 15.419,-102.066 16.01,-102.066 18.783,-102.066 19.143,-101.706 19.143,-94.382 19.249,-94.276 22.043,-94.276 22.36,-93.959 22.392,-93.991 26.012,-93.991 26.128,-94.107 26.128,-105.706 25.641,-106.193 19.566,-106.193
  region net NewNet20: 8.687,-101.007 14,-101.007 16.074,-98.933 16.074,-96.52 15.185,-95.631 13.513,-95.631 8.687,-100.457
  region net NewNet1: 15.714,-89.641 15.714,-88.371 15.905,-88.18 18.064,-88.18 18.064,-88.392 20.477,-90.805 20.477,-92.985 19.249,-92.985 19.249,-91.779 17.344,-89.874 15.926,-89.874
  region net NewNet4: 12.073,-92.202 12.073,-92.666 11.201,-93.539 8.051,-93.539 7.772,-93.26 7.772,-92.313 8.009,-92.075 9.279,-92.075 12.296,-92.075
  region net NewNet4: 19.122,-86.254 20.879,-88.011 22.36,-88.011 22.36,-86.995 20.455,-86.995 19.715,-86.254
  region net NewNet8: 23.99,-89.683 23.271,-90.403 23.271,-91.969 25.006,-91.969 25.006,-88.328 23.99,-88.328
  region net NewNet13: -4.267,-103.717 -0.224,-103.717 1.405,-102.087 1.405,-98.848 1.067,-98.51 -0.754,-98.51 -1.24,-98.996 -1.177,-99.06 -1.177,-101.706 -2.108,-102.637 -4.267,-102.637
  region net NewNet31: 37.452,-58.251 32.976,-58.251 32.965,-58.24 32.584,-58.621 32.584,-64.611 33.092,-65.119 37.696,-65.119 38.193,-64.622 38.193,-58.991
  region net NewNet7: 25.12,-86.269 25.907,-86.701 25.095,-87.133
  text "HTY-21024A V02" at 147.545,-110.632 h1.5

## Silkscreen, mask and mechanical layers (free items; w line width, h text height)
Top Overlay:
  lines w0.28: -20.1,-88.858 -20.1,-104.86 -0.034,-104.86 -0.034,-100.288 ; -20.058,-88.815 -0.161,-88.815 -0.161,-93.26 ; -16.121,-82.211 -8.162,-82.211 ; -16.121,-81.068 -16.121,-84.709 -8.098,-84.709 -8.098,-81.068 -16.036,-81.068 ; -16.121,-50.461 -16.121,-54.06 -8.12,-54.06 -8.12,-50.461 -16.036,-50.461 ; -16.099,-51.604 -8.141,-51.604 ; -16.078,-71.205 -16.078,-74.761 -8.098,-74.761 -8.098,-71.162 -16.036,-71.162 ; -16.036,-83.481 -8.141,-83.481 ; -16.036,-52.832 -8.141,-52.832 ; -16.015,-60.537 -16.015,-64.156 -8.077,-64.156 -8.077,-60.494 -16.015,-60.494 ; -15.972,-62.907 -8.035,-62.907 ; -15.951,-73.533 -8.077,-73.533 ; -15.951,-72.263 -8.12,-72.263 ; -15.951,-61.68 -8.141,-61.68 ; -14.064,-46.969 ccw(c-12.921,-46.969) -12.921,-48.112 -10.465,-48.112 ; -13.432,-62.971 -12.861,-63.542 -12.226,-62.907 ; -13.411,-73.575 -12.861,-74.126 -12.268,-73.533 ; -13.411,-52.874 -12.861,-53.425 -12.289,-52.853 ; -13.348,-83.481 -12.797,-84.032 -12.247,-83.481 ; -12.099,-51.583 -11.4,-50.885 -10.702,-51.583 ; -12.078,-82.211 -11.422,-81.555 -10.765,-82.211 ; -12.014,-72.284 -11.379,-71.649 -10.787,-72.242 ; -12.014,-61.68 -11.337,-61.002 -10.702,-61.637 ; -10.465,-48.103 ccw(c-10.465,-47.265) -9.627,-47.265 ; -9.619,-47.265 -9.619,-47.032 ; -9.61,-47.032 cw(c-8.137,-47.032) -8.137,-45.559 ; -8.137,-45.551 -5.893,-45.551 ; -5.893,-45.563 cw(c-5.893,-46.376) -5.081,-46.376 -5.081,-46.93 -3.449,-46.93 ; 0.389,-63.225 0.389,-45.445 ; 0.389,-45.381 8.306,-45.381 8.306,-63.225 ; 1.532,-78.359 6.062,-76.242 11.587,-76.242 ; 7.044,-105.895 ccw(c23.096,-105.683) 7.044,-105.883 ; 13.018,-105.706 ccw(c22.975,-105.6) 13.018,-105.495
  lines w0.3: -15.61,-46.969 -14.064,-46.969
  text "06005A" at 19.084,-98.163 h1.3
  text "20180528" at 17.983,-100.618 h1.3
  text "V1.1" at -6.257,-114.766 h1.5 r90
  text "21024A" at -19.889,-117.613 h1
  text "E123995" at 3.734,-127.127 h1.5 r90
  text "KB-3151C" at 0.135,-127.466 h1.5 r90
  text "RA125-1" at -6.236,-127.847 h1.5 r90
  text "SM1504 94V-0" at -3.251,-128.143 h1.5 r90
Bottom Solder:
  lines w0.6: -14.014,-116.082 -15.233,-115.549 -13.81,-115.117 ; -14.014,-113.542 -15.233,-113.009 -13.81,-112.577 ; -13.513,-127.6 -14.733,-127.067 -13.31,-126.635 ; -13.513,-125.06 -14.733,-124.527 -13.31,-124.095 ; -13.513,-122.52 -14.733,-121.987 -13.31,-121.555 ; -13.064,-115.117 -11.642,-115.549 -12.861,-116.082 ; -13.064,-112.577 -11.642,-113.009 -12.861,-113.542 ; -12.726,-124.4 -11.253,-124.12 -12.37,-125.035 ; -12.564,-126.635 -11.141,-127.067 -12.361,-127.6
  lines w1.8: -8.709,-96.965 0.061,-96.965 ; 12.252,-76.222 15.563,-76.222 16.382,-75.403 16.382,-52.543

## Dimensions
-20.904,-130.683 to 40.096,-130.683 on Keep-Out Layer
-20.904,-130.683 to -20.904,-44.183 on Keep-Out Layer
-5,0 to 127,2.3 on Top Overlay
-5,0 to -5,259.5 on Top Overlay

## Text inside footprints (layer, text, board x,y; h text height)
Q19: Top Overlay "94HB" at 149.229,-76.59 h1.52; Top Overlay "94V0" at 136.879,-76.59 h1.52; Top Overlay "22F" at 117.715,-76.519 h1.52; Top Overlay "CEM-1" at 101.715,-76.519 h1.52; Top Overlay "FR-4" at 89.379,-76.519 h1.52; Top Overlay "FR-1" at 77.491,-76.494 h1.52; Top Overlay "oZ" at 80.057,-80.406 h1.52; Top Overlay "mm" at 78.736,-84.52 h1.5; Top Overlay "mm" at 91.157,-84.47 h1.5; Top Overlay "mm" at 104.559,-84.47 h1.5; Top Overlay "mm" at 118.25,-84.571 h1.5; Top Overlay "oZ" at 92.489,-80.406 h1.52; Top Overlay "oZ" at 105.966,-80.406 h1.52; Top Overlay "1.6" at 75.917,-84.547 h1.52; Top Overlay "0.5" at 76.45,-80.406 h1.52; Top Overlay "1.0" at 89.277,-80.458 h1.52; Top Overlay "1.2" at 88.337,-84.547 h1.52; Top Overlay "1.0" at 101.74,-84.547 h1.52; Top Overlay "0.8" at 115.05,-84.647 h1.52; Top Overlay "2.0" at 102.578,-80.38 h1.52